# Altium PCB 5vto3.3v.PcbDoc
Units mil, origin at the board's own origin, x right, y up, seen from the top; angles counter-clockwise.
Board outline 6000 x 4000 mil, 2 copper layers (Top Layer, Bottom Layer); 7 components, 4 nets, 21 pads, 0 vias.
Unrouted connection lines stored in the file: 10.
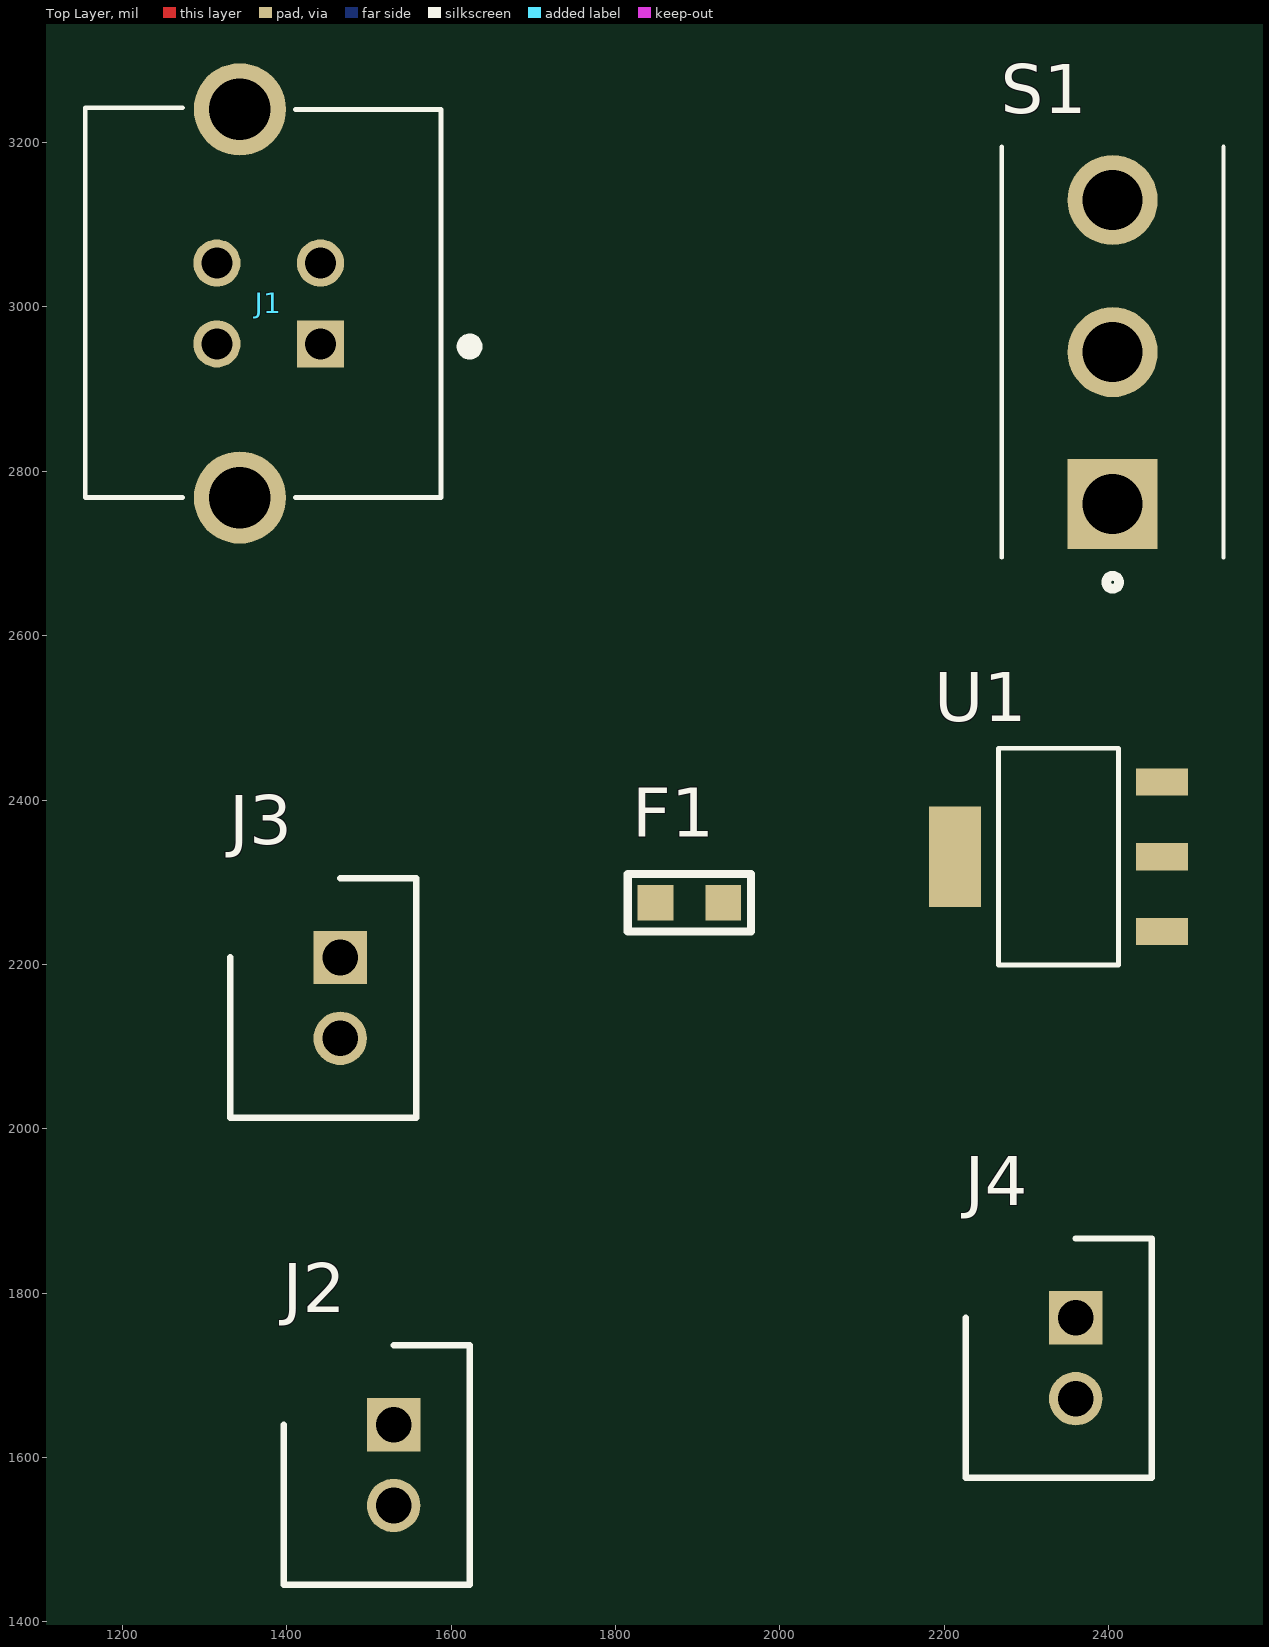
[diagram p0: Top Layer view]
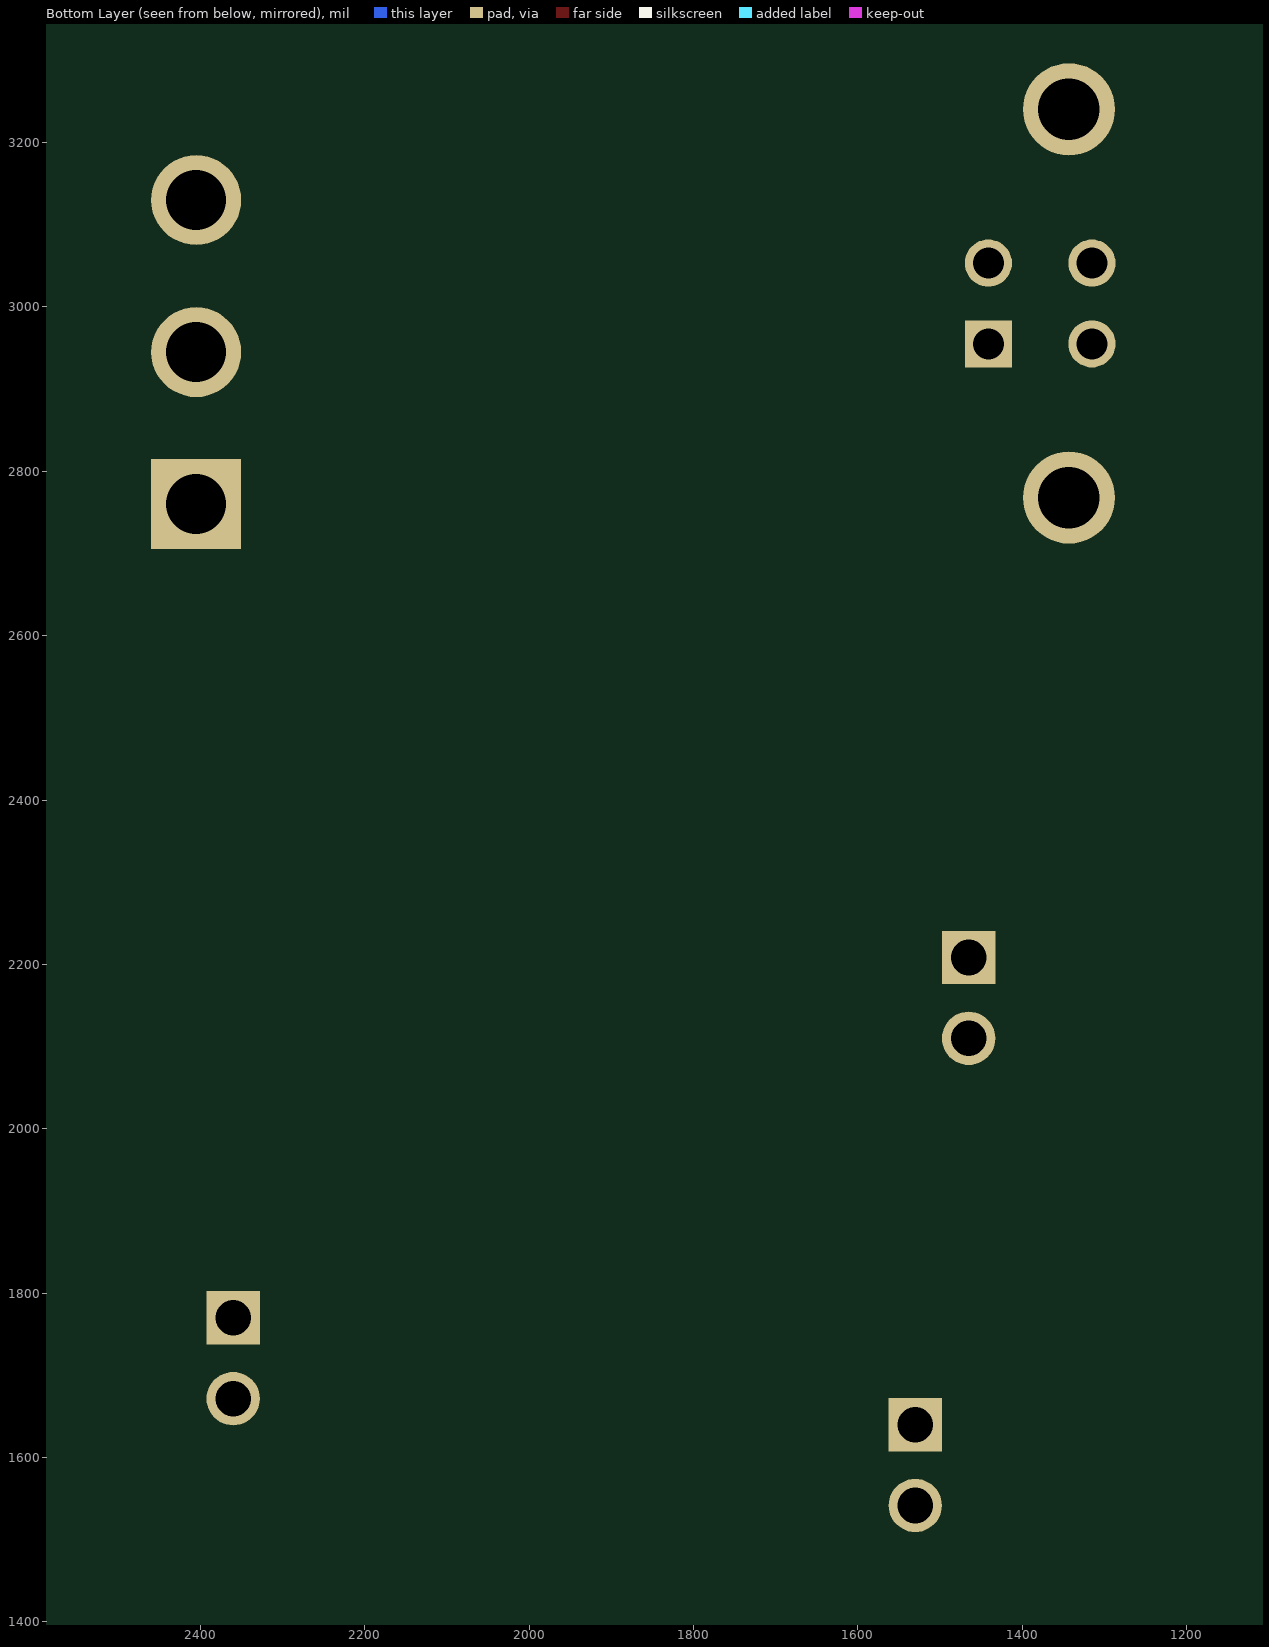
[diagram p1: Bottom Layer view, seen from below]

## Layer stack, top to bottom
Top Solder: solder mask 0.4, Solder Resist, Dk 3.5
Top Layer: signal copper 1.4
Dielectric 1: dielectric 12.6, FR-4, Dk 4.8
Bottom Layer: signal copper 1.4
Bottom Solder: solder mask 0.4, Solder Resist, Dk 3.5

## Board outline
1000,1000 7000,1000 7000,5000 1000,5000

## Design rules (kind name [scope] priority, off if disabled: settings)
Clearance [All] p1: gap=10 ignorepadtopadclearanceinfootprint=FALSE except(0: Arc-Hole Track-Hole SMDPad-Hole THPad-Hole Via-Hole Fill-Hole Poly-Hole Region-Hole Text-Hole)
Height [All] p1: minheight=0 maxheight=2000 prefheight=500
PolygonConnect [All] p1: connectstyle=Relief reliefconductorwidth=10 reliefentries=4 polygonreliefangle="90 Angle" airgapwidth=10
RoutingVias [All] p1: holewidth=28 width=50 viastyle="Through Hole" minholewidth=28 minwidth=50 maxholewidth=28 maxwidth=50
SilkToSilkClearance [All] p1: silktosilkclearance=1
SilkToSolderMaskClearance [IsPad] p1: minsilkscreentomaskgap=1 clearancetoexposedcopper=TRUE
SolderMaskExpansion [All] p1: expansion=4
Width [All] p1: maxlimit=10 minlimit=10 preferedwidth=10
27 further rules are at their usual default settings.

## Components (designator, comment, footprint, x,y, rotation, side; value= is the part's Value field where it differs from the comment)
F1 "500ma" "FUSE 0603" 1890,2275 r0 top
J1 "USB-B" SAMTEC_USB-B-S-S-B-VT-R 1440.98,3004.21 r270 top
J2 "1x2 header" B2B-XH-A(LF)(SN) 1529,1638 r270 top
J3 "1x2 header" B2B-XH-A(LF)(SN) 1464,2206.43 r270 top
J4 "1x2 header" B2B-XH-A(LF)(SN) 2359,1768 r270 top
S1 "TOGGLE SWITCH" A101SYCQ04 2403,2948 r90 top
U1 "LM1117" LM1117MP-3.3 2335,2330 r180 top

## Footprints (in the part's own frame and the unit in brackets; to place one, negate y for a bottom-side part, rotate by r counter-clockwise, add the part's x,y. Pads: shape width x height; smd on the part's side, far side on the other; paste and mask are expansions set on the pad)
A101SYCQ04 [mil]
  rect 109.5x109.5 hole 73: 1(-188,-2)
  round 109.5 hole 73: 2(-3,-2) 3(182,-2)
  silkscreen extent -291,-137 247,133, body extent -253,-137 247,133, height 1110
B2B-XH-A(LF)(SN) [mm]
  rect 1.65x1.65 / inner round 1.65 / far side rect 1.65x1.65 hole 1.1: 1(-0.051,0.025)
  round 1.65 hole 1.1: 2(2.449,0.025)
  silkscreen extent -2.5,-3.37 4.9,2.38, body extent -2.5,-3.48 4.9,2.32, height 7
"FUSE 0603" [mm]
  rect 1.1x1.1 smd: 1(-1.05,0) 2(1.05,0)
  silkscreen extent -1.91,-0.89 1.91,0.89, body extent -0.8,-0.38 0.8,1.27, height 2.9
LM1117MP-3.3 [mil]
  rect 63x33 smd: 1(-130,90) 2(-130,-1) 3(-130,-92)
  rect 63x122 smd: 4(122,-1)
  silkscreen extent -77,-133 69,131, body extent -153,-133 135,203, height 63
SAMTEC_USB-B-S-S-B-VT-R [mm]
  rect 1.458x1.458 hole 0.95: 1(1.25,0)
  round 1.458 hole 0.95: 2(-1.25,0) 3(-1.25,-3.2) 4(1.25,-3.2)
  round 2.85 hole 1.9: 5(6,-2.49) 6(-6,-2.49)
  silkscreen extent -6.05,-7.27 6,4.81, body extent -9.73,-7.28 7.3,3.92, height 4.21

## Part data
F1: library part 0494.500NRHF, "FUSE BOARD MOUNT 500MA 32VAC/VDC", Case Code (Imperial)=0603, Case Code (Metric)=1608, Current Rating=500mA, Manufacturer=Littelfuse, Max Operating Temperature=90°C, Min Operating Temperature=-55°C, Package Quantity=5000, Supplier Part Number 1=F5802CT-ND, Voltage Rating (AC)=32V, Approvals=CSA,UR, ComponentLink1Description=http://www.littelfuse.com/~/media/electronics/datasheets/fuses/littelfuse_fuse_494_datasheet.pdf.pdf, ComponentLink1URL=http://www.littelfuse.com/~/media/electronics/datasheets/fuses/littelfuse_fuse_494_datasheet.pdf.pdf, Fuse Type="Board Mount (Cartridge Style Excluded)", Height=0.012inch, Length=0.063inch, Manufacturer Part Number=0494.500NRHF, Mount="Surface Mount", Packaging="Tape and Reel", Stock 1=0, Supplier 1=Digi-Key, Voltage Rating (DC)=32V, Width=0.032inch
J1: library part 67068-8000, "MOLEX         67068-8000            USB, 2.0 TYPE B, RECEPTACLE, THT", Color=Black, Current Rating=1.5A, Flammability Rating="UL94 V-0", Insulation Resistance=1GR, Manufacturer=Molex, Max Operating Temperature=50°C, Max Voltage Rating (AC)=30V, Min Operating Temperature=0°C, Package Quantity=1200, Supplier Part Number 1=0670688000, Catagory=Connector, ComponentLink1Description=http://uk.rs-online.com/webdocs/13c4/0900766b813c46c9.pdf, ComponentLink1URL=http://uk.rs-online.com/webdocs/13c4/0900766b813c46c9.pdf, ComponentLink2Description=http://www.molex.com/webdocs/datasheets/pdf/en-us/0670688000_IO_CONNECTORS.pdf, ComponentLink2URL=http://www.molex.com/webdocs/datasheets/pdf/en-us/0670688000_IO_CONNECTORS.pdf, ComponentLink3Description=https://www.verical.com/server-webapp/html/getDatasheet?partID=152710, ComponentLink3URL=https://www.verical.com/server-webapp/html/getDatasheet?partID=152710, ComponentLink4Description=http://www.farnell.com/datasheets/2051863.pdf, ComponentLink4URL=http://www.farnell.com/datasheets/2051863.pdf, ComponentLink5Description=http://www.mouser.com/ds/2/276/0670688000_IO_CONNECTORS-172066.pdf, ComponentLink5URL=http://www.mouser.com/ds/2/276/0670688000_IO_CONNECTORS-172066.pdf, ComponentLink6Description=http://www.onlinecomponents.com/productFiles/mf-MOL/782280670688000_io_nectors.pdf, ComponentLink6URL=http://www.onlinecomponents.com/productFiles/mf-MOL/782280670688000_io_nectors.pdf, Connector Type=Receptacle,USB, Contact Material=Bronze, Contact Plating=Gold, Depth=17mm, Gender=Female, Housing Color=Black, Housing Material=Nylon, Lead Free="Lead Free", Length=12mm, Manufacturer Part Number=67068-8000, Mount="Through Hole", Number of Circuits=4, Number of Contacts=4, Number of Ports=1, Number of Positions=4, Number of Rows=2, Number of Terminals=4, Orientation="Right Angle", Packaging=Tray, Pitch=2.5mm, Pricing 1="1=0.4389, 10=0.4379, 25=0.4369, 50=0.4359, 100=0.4349 (USD)", Radiation Hardening=No, REACH SVHC=Unknown, Stock 1=0, Supplier 1=Avnet, Termination=Solder, USB Standard="USB 2.0", Voltage Rating=30V
J2 J3 J4: library part B2B-XH-A(LF)(SN), "HEADER, VERTICAL, 2WAY", Color=Natural, Contact Resistance=20mR, Current Rating=3A, Housing Color=White, Insulation Resistance=1GR, Manufacturer=JST, Max Operating Temperature=85°C, Max Voltage Rating (AC)=250V, Min Operating Temperature=-25°C, Supplier Part Number 1=455-2247-ND, ComponentLink1Description=https://www.verical.com/server-webapp/html/getDatasheet?partID=640357, ComponentLink1URL=https://www.verical.com/server-webapp/html/getDatasheet?partID=640357, ComponentLink2Description=http://www.farnell.com/datasheets/2057209.pdf, ComponentLink2URL=http://www.farnell.com/datasheets/2057209.pdf, ComponentLink3Description=https://www.verical.com/server-webapp/html/getDatasheet?partID=385291, ComponentLink3URL=https://www.verical.com/server-webapp/html/getDatasheet?partID=385291, ComponentLink4Description=http://www.rapidonline.com/pdf/523653.pdf, ComponentLink4URL=http://www.rapidonline.com/pdf/523653.pdf, Connector Type="Male Pin", Contact Material=Brass, Contact Plating=Copper,Lead,Tin, Depth=5.75mm, Fastening Type=Detent, Housing Material=Polyamide, Lead Free="Lead Free", Lead Pitch=2.5mm, Length=7.4mm, Manufacturer Part Number=B2B-XH-A(LF)(SN), Max Current Rating=3A, Max Voltage Rating (DC)=250V, Mount="Through Hole", Number of Contacts=2, Number of Positions=2, Number of Rows=1, Orientation=Straight, Packaging=Bulk, Pitch=2.5mm, REACH SVHC="No SVHC", Stock 1=404007, Supplier 1=Digi-Key, Termination=Solder, Voltage Rating=250V, Voltage Rating (AC)=250V, Wire/Cable Gauge=22AWG
S1: library part A101SYCQ04, "Toggle Switches ON-ON SPDT Bat Long", Contact Current Rating=5A, Contact Resistance=10mR, Flammability Rating="UL94 V-1", Manufacturer="TE Connectivity", Max Operating Temperature=85°C, Max Voltage Rating (AC)=250V, Max Voltage Rating (DC)=28V, Min Operating Temperature=-30°C, Package Quantity=100, Supplier Part Number 1=72R6942, Actuator Length=10.41mm, Actuator Material=Phenolic, ComponentLink1Description=http://www.farnell.com/datasheets/1491719.pdf, ComponentLink1URL=http://www.farnell.com/datasheets/1491719.pdf, ComponentLink2Description=http://www.farnell.com/datasheets/84591.pdf, ComponentLink2URL=http://www.farnell.com/datasheets/84591.pdf, Contact Material=Copper,Silver, Contact Plating=Silver, Current Rating=5A, ELV=Compliant, Illumination Type=Illuminated, Lead Free="Lead Free", Manufacturer Part Number=A101SYCQ04, Mount=PCB, Packaging=Bulk, Pricing 1="1=2.78, 10=2.67, 25=2.55, 50=2.36, 100=2.33, 500=2.18, 1000=1.96, 2500=1.92 (USD)", REACH SVHC=Unknown, Stock 1=937, Supplier 1=Newark, Termination=Solder, Throw Configuration=SPDT, Voltage Rating (AC)=250V
U1: library part LM1117MPX-3.3/NOPB, "TEXAS INSTRUMENTS   LM1117MPX-3.3/NOPB.   LINEAR REG, FIX, 3.3V, 800MA, SOT-223-4, FULL REEL", Case/Package=SOT-223, Current Rating=800mA, Dropout Voltage=1.2V, Manufacturer="Texas Instruments", Max Input Voltage=15V, Max Operating Temperature=125°C, Max Output Voltage=3.3V, Min Input Voltage=2.6V, Min Operating Temperature=-40°C, Output Voltage Accuracy=1%, Quiescent Current=10mA, Accuracy=1%, ComponentLink1Description=http://www.ti.com/general/docs/lit/getliterature.tsp?genericPartNumber=LM1117&&fileType=pdf, ComponentLink1URL=http://www.ti.com/general/docs/lit/getliterature.tsp?genericPartNumber=LM1117&&fileType=pdf, ComponentLink2Description=http://www.farnell.com/datasheets/1772317.pdf, ComponentLink2URL=http://www.farnell.com/datasheets/1772317.pdf, Contact Plating=Matte,Tin, Height=1.6mm, Lead Free="Lead Free", Length=6.5mm, Manufacturer Part Number=LM1117MPX-3.3/NOPB, Max Output Current=800mA, Mount="Surface Mount", Nominal Output Voltage=3.3V, Number of Outputs=1, Number of Pins=4, Output Current=800mA, Output Type=Fixed, Output Voltage=3.3V, Packaging="Tape and Reel", Polarity=Positive, Pricing 1="1=0.4329, 2001=0.3972 (USD)", REACH SVHC="No SVHC", Stock 1=3, Supplier 1=Arrow, Supplier Part Number 1=LM1117MPX-3.3/NOPB, Width=3.56mm

## Nets (pads, with @x,y where several pads share a name; then routed paths per layer and width w, separated by ;. In a path a pad name is that pad's centre, name@x,y a point inside that pad or via, vN(x,y) a via of type N, cw(c..) or ccw(c..) an arc to the next point about the centre after c; other vN are vias at no path point)
NetF1_1: F1.1 S1.1
NetJ1_4: J1.4 J2.2 J3.2 J4.2 U1.1
NetJ2_1: J2.1 J3.1 S1.2 U1.3
NetJ4_1: J4.1 U1.2 U1.4
pads on no net: F1.2 J1.1 J1.2 J1.3 J1.5 J1.6 S1.3